# EAGLE board untitled (EAGLE 7.2.0)
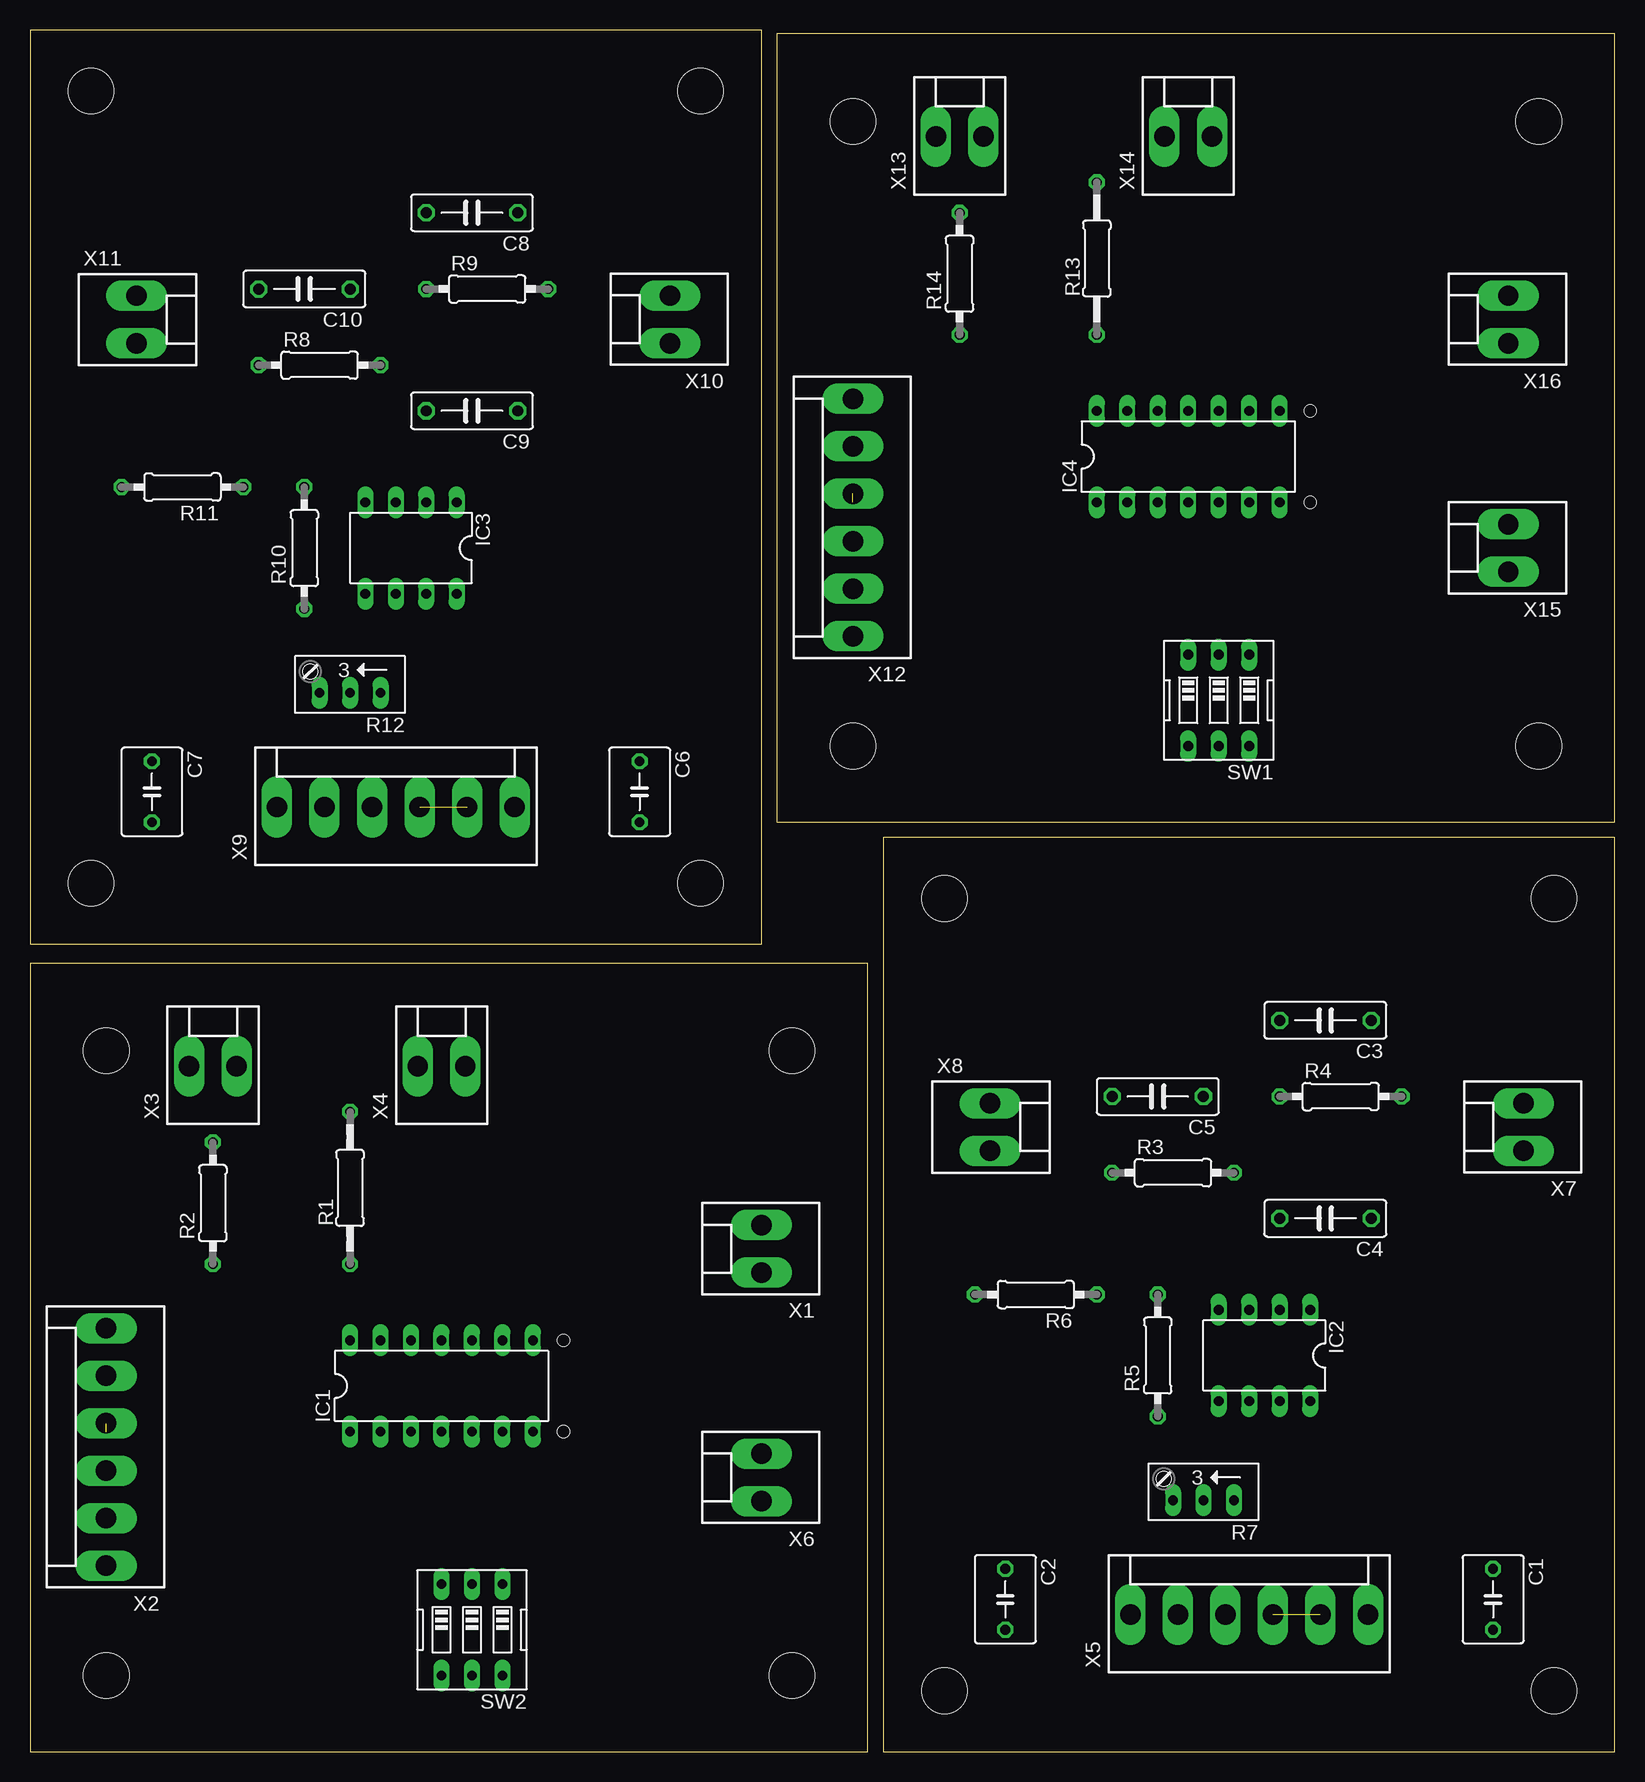
[diagram p0: board, top side]
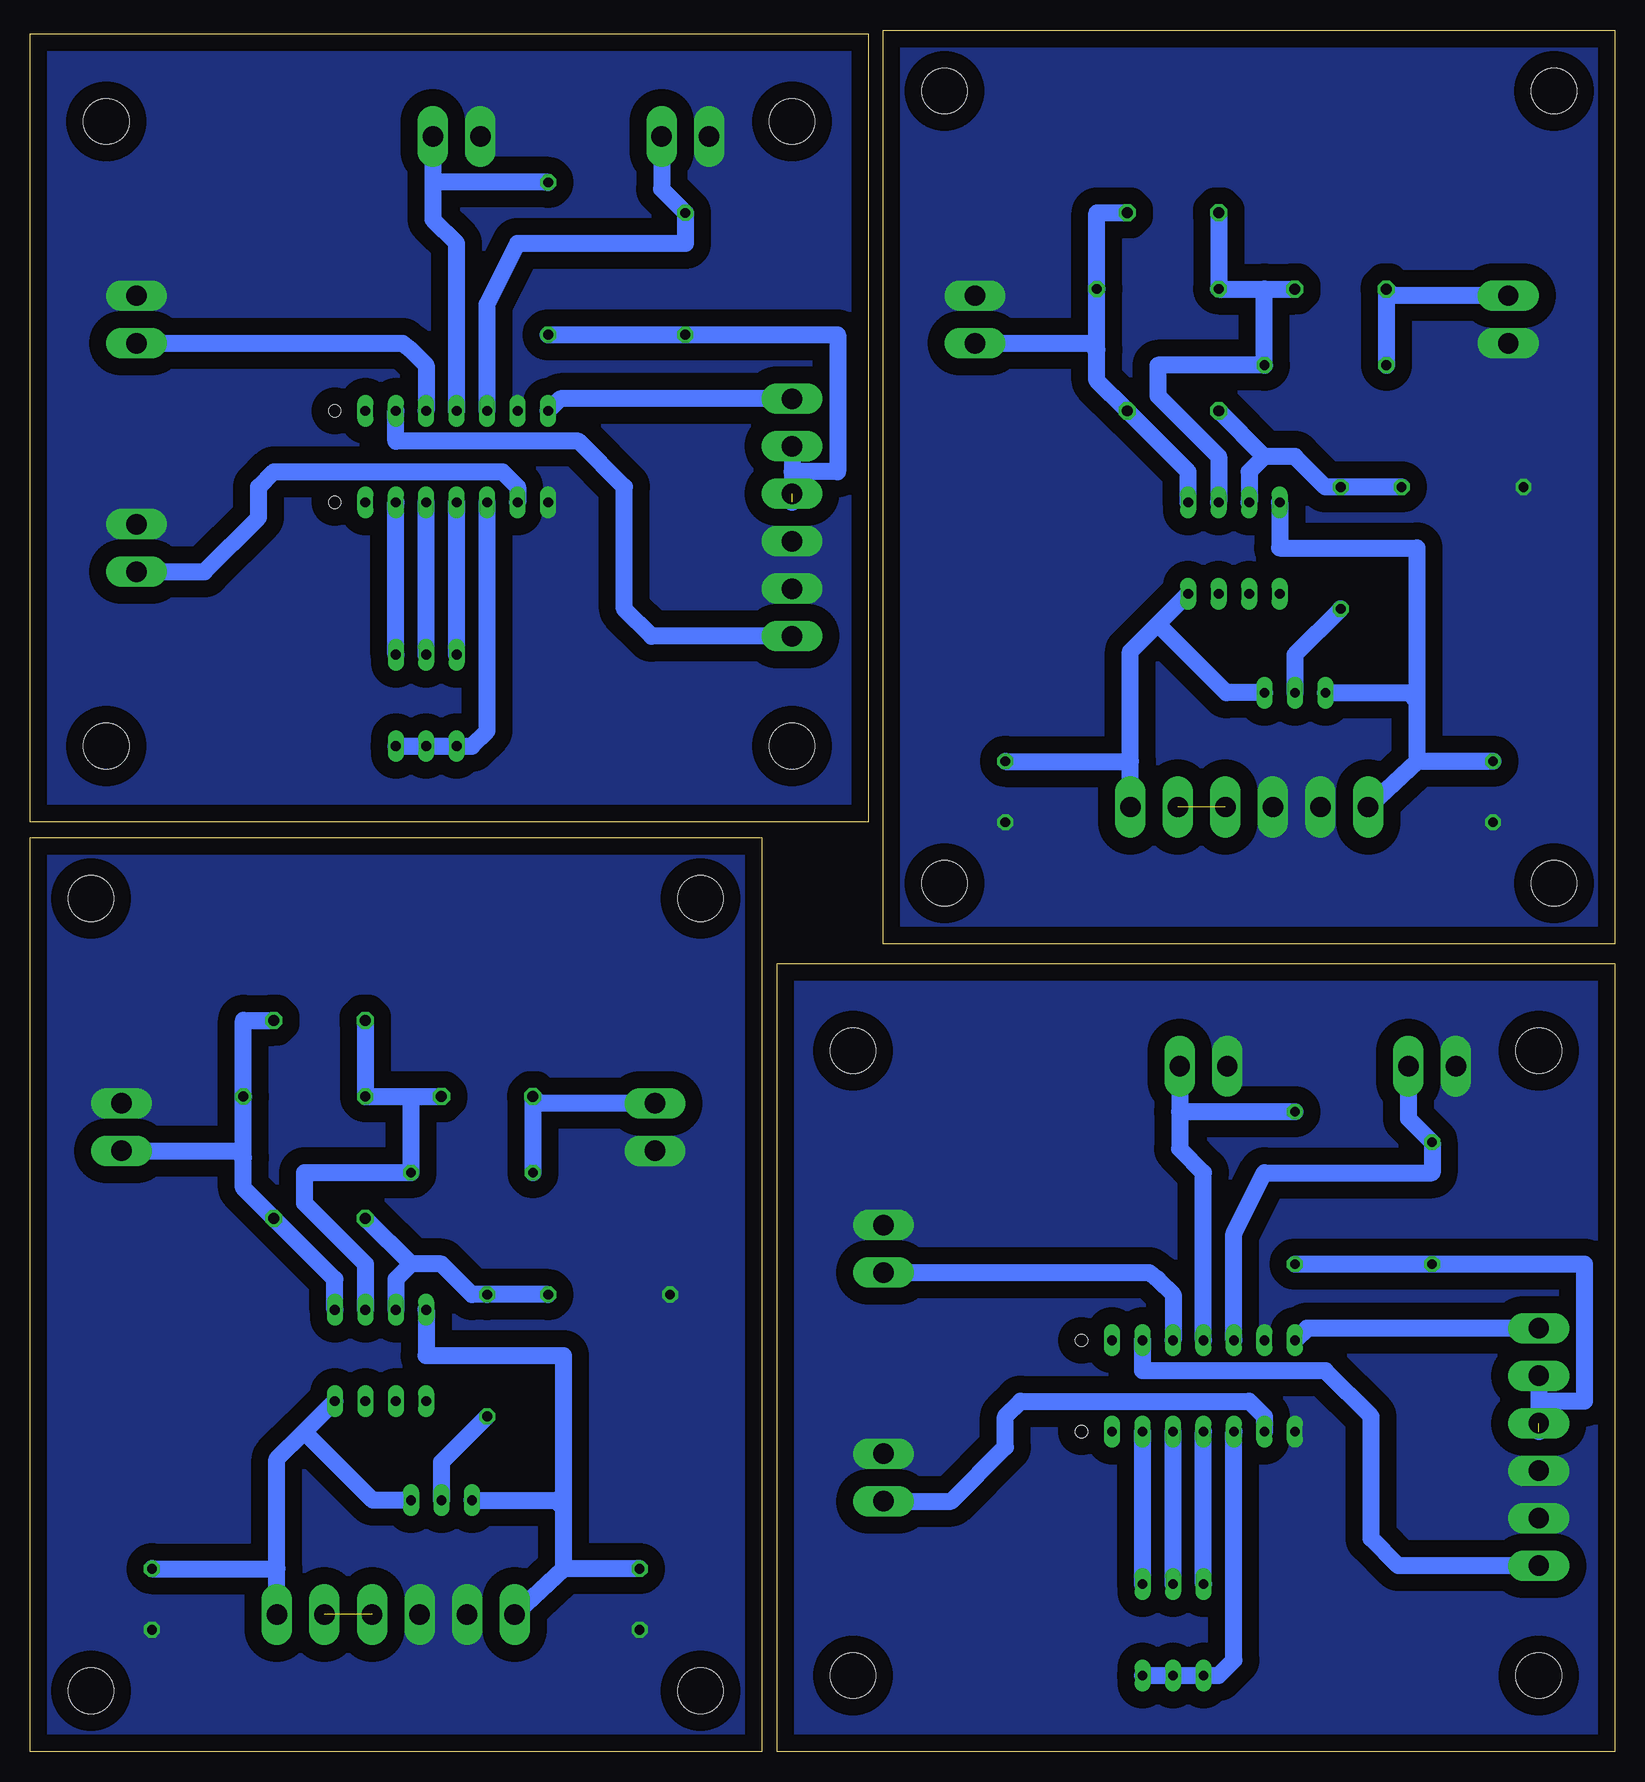
[diagram p1: board, bottom side, seen from below]

Size 132.08 x 143.51 mm. Coordinates in mm from the lower left corner, seen from the top.
Outline: 0,0 69.83,0 69.83,65.71 0,65.71 0,0
Outline: 71.12,0 132.08,0 132.08,76.2 71.12,76.2 71.12,0
Outline: 0,67.31 60.96,67.31 60.96,143.51 0,143.51 0,67.31
Outline: 62.23,77.47 132.06,77.47 132.06,143.18 62.23,143.18 62.23,77.47
Copper layers (1*16): Top 0.035mm / dielectric 1.5mm / Bottom 0.035mm
Design rules "default": minimum track width 10mil, minimum drill 24mil, track to track 8mil, track to pad 8mil, pad to pad 8mil, via to via 8mil, smd to smd 8mil, copper to edge 40mil, drill to drill 8mil, minimum pad ring 10mil, minimum via ring 8mil, stop-mask expansion 4mil, vias tented up to drill 0mil, thermal gap 10mil
Holes 3.8 mm at 63.5,6.35 6.35,6.35 6.35,58.42 63.5,58.42 76.2,71.12 127,71.12 127,5.08 76.2,5.08 5.08,138.43 55.88,138.43 55.88,72.39 5.08,72.39 125.73,83.82 68.58,83.82 68.58,135.89 125.73,135.89
Holes 1 mm at 44.45,34.29 44.45,26.67 106.68,111.76 106.68,104.14

## Footprints (pad centres in the part's own frame; a part is rotated, then mirrored left to right if it is on the bottom)
C050-050X075 = drill 0.813 octagon: 1 -2.54,0; 2 2.54,0
C075-032X103 = drill 0.914 octagon: 1 -3.81,0; 2 3.81,0
DIL14 = drill 0.813 long: 1 -7.62,-3.81; 2 -5.08,-3.81; 3 -2.54,-3.81; 4 0,-3.81; 5 2.54,-3.81; 6 5.08,-3.81; 7 7.62,-3.81; 8 7.62,3.81; 9 5.08,3.81; 10 2.54,3.81; 11 0,3.81; 12 -2.54,3.81; 13 -5.08,3.81; 14 -7.62,3.81
DIL08 = drill 0.813 long: 1 -3.81,-3.81; 2 -1.27,-3.81; 3 1.27,-3.81; 4 3.81,-3.81; 5 3.81,3.81; 6 1.27,3.81; 7 -1.27,3.81; 8 -3.81,3.81
0207/12 = drill 0.813 octagon: 1 -6.35,0; 2 6.35,0
0207/10 = drill 0.813 octagon: 1 -5.08,0; 2 5.08,0
RJ9W = drill 0.813 long: A 2.54,0.635; E -2.54,0.635; S 0,0.635
EDG-03 = drill 0.813 long: 1 -2.54,-3.81; 2 0,-3.81; 3 2.54,-3.81; 4 2.54,3.81; 5 0,3.81; 6 -2.54,3.81
KK-156-2 = drill 1.7 pad 2.184 long: 1 -1.98,0; 2 1.98,0
KK-156-6 = drill 1.7 pad 2.184 long: 1 -9.9,0; 2 -5.94,0; 3 -1.98,0; 4 1.98,0; 5 5.94,0; 6 9.9,0

## Placement (x,y rotation side)
C1  .1u  [C050-050X075]  121.92,12.7 270 top
C2  .1u  [C050-050X075]  81.28,12.7 270 top
C3  gimmick  [C075-032X103]  107.95,60.96 180 top
C4  150p  [C075-032X103]  107.95,44.45 180 top
C5  .68n  [C075-032X103]  93.98,54.61 180 top
C6  .1u  [C050-050X075]  50.8,80.01 270 top
C7  .1u  [C050-050X075]  10.16,80.01 270 top
C8  gimmick  [C075-032X103]  36.83,128.27 180 top
C9  150p  [C075-032X103]  36.83,111.76 180 top
C10  .68n  [C075-032X103]  22.86,121.92 180 top
IC1  IVC102UADAPTOR  [DIL14]  34.29,30.48 0 top
IC2  LF442N  [DIL08]  102.87,33.02 180 top
IC3  LF442N  [DIL08]  31.75,100.33 180 top
IC4  IVC102UADAPTOR  [DIL14]  96.52,107.95 0 top
R1  [0207/12]  26.67,46.99 90 top
R2  [0207/10]  15.24,45.72 90 top
R3  1M  [0207/10]  95.25,48.26 0 top
R4  10M  [0207/10]  109.22,54.61 0 top
R5  1M  [0207/10]  93.98,33.02 90 top
R6  649  [0207/10]  83.82,38.1 180 top
R7  50k  [RJ9W]  97.79,21.59 180 top
R8  1M  [0207/10]  24.13,115.57 0 top
R9  10M  [0207/10]  38.1,121.92 0 top
R10  1M  [0207/10]  22.86,100.33 90 top
R11  649  [0207/10]  12.7,105.41 180 top
R12  50k  [RJ9W]  26.67,88.9 180 top
R13  [0207/12]  88.9,124.46 90 top
R14  [0207/10]  77.47,123.19 90 top
SW1  [EDG-03]  99.06,87.63 180 top
SW2  [EDG-03]  36.83,10.16 180 top
X1  [KK-156-2]  60.96,41.91 90 top
X2  [KK-156-6]  6.35,25.4 90 top
X3  [KK-156-2]  15.24,57.15 0 top
X4  [KK-156-2]  34.29,57.15 0 top
X5  [KK-156-6]  101.6,11.43 0 top
X6  [KK-156-2]  60.96,22.86 90 top
X7  [KK-156-2]  124.46,52.07 90 top
X8  [KK-156-2]  80.01,52.07 270 top
X9  [KK-156-6]  30.48,78.74 0 top
X10  [KK-156-2]  53.34,119.38 90 top
X11  [KK-156-2]  8.89,119.38 270 top
X12  [KK-156-6]  68.58,102.87 90 top
X13  [KK-156-2]  77.47,134.62 0 top
X14  [KK-156-2]  96.52,134.62 0 top
X15  [KK-156-2]  123.19,100.33 90 top
X16  [KK-156-2]  123.19,119.38 90 top

## Library data of the parts
C1-C10 R1-R6 R8-R11 R13 R14 = resistor
IC1 IC4 = burr-brown
IC2 IC3 = linear
R7 R12 = pot
SW1 SW2 = special
X1-X16 = con-molex; OC_FARNELL: unknown; OC_NEWARK: unknown

## Nets
+5V: R1.1 R2.1 X2.4 X2.5
+5V1: X5.4 X5.5
+5V2: X9.4 X9.5
+5V3: R13.1 R14.1 X12.4 X12.5
+15V: IC1.14 X2.6
+15V1: C1.1 IC2.8 R7.E X5.6
+15V2: C6.1 IC3.8 R12.E X9.6
+15V3: IC4.14 X12.6
-15V: IC1.9 X2.1
-15V1: C2.1 IC2.4 R7.A X5.1
-15V2: C7.1 IC3.4 R12.A X9.1
-15V3: IC4.9 X12.1
GND: IC1.1 IC1.13 X1.2 X2.2 X2.3 X3.1 X4.1 X6.2
GND1: C1.2 C2.2 R6.2 X5.2 X5.3 X7.2 X8.2
GND2: C6.2 C7.2 R11.2 X9.2 X9.3 X10.2 X11.2
GND3: IC4.1 IC4.13 X12.2 X12.3 X13.1 X14.1 X15.2 X16.2
N$1: IC1.6 SW2.1
N$2: IC1.5 SW2.2
N$3: IC1.4 SW2.3
N$4: IC1.3 SW2.4 SW2.5 SW2.6
N$5: IC1.2 X6.1
N$6: IC1.10 X1.1
N$7: C3.2 C5.1 IC2.2 R3.2 R4.1
N$8: C3.1 C4.1 IC2.1 R4.2 X7.1
N$9: C5.2 R3.1 X8.1
N$10: C4.2 IC2.3 R5.2 R6.1
N$11: R5.1 R7.S
N$12: C8.2 C10.1 IC3.2 R8.2 R9.1
N$13: C8.1 C9.1 IC3.1 R9.2 X10.1
N$14: C10.2 R8.1 X11.1
N$15: C9.2 IC3.3 R10.2 R11.1
N$16: R10.1 R12.S
N$17: IC4.6 SW1.1
N$18: IC4.5 SW1.2
N$19: IC4.4 SW1.3
N$20: IC4.3 SW1.4 SW1.5 SW1.6
N$21: IC4.2 X15.1
N$22: IC4.10 X16.1
RESET: IC1.12 R2.2 X3.2
RESET1: IC4.12 R14.2 X13.2
SAMPLE: IC1.11 R1.2 X4.2
SAMPLE1: IC4.11 R13.2 X14.2

## Tracks (layer width: path | path; a pad name or v marks a point on that pad's centre or on a via)
+5V  (1 unrouted)
  Bottom 1.422: X2.5 6.35,29.21 | 6.35,29.21 6.35,26.67 | R1.1 R2.1 2.54,40.64 2.54,29.21 6.35,29.21
+5V1  (1 unrouted)
+5V2  (1 unrouted)
+5V3  (1 unrouted)
  Bottom 1.422: X12.5 68.58,106.68 | 68.58,106.68 68.58,104.14 | R13.1 R14.1 64.77,118.11 64.77,106.68 68.58,106.68
+15V
  Bottom 1.422: X2.6 25.66,35.3 IC1.14
+15V1
  Bottom 1.422: X5.6 111.5,15.24 | 111.5,15.24 111.5,24.39 109.22,26.67 | 109.22,26.67 IC2.8 | C1.1 111.5,15.24 | R7.E 103.5,20.95 109.22,26.67
+15V2
  Bottom 1.422: X9.6 40.38,82.55 | 40.38,82.55 40.38,91.7 38.1,93.98 | 38.1,93.98 IC3.8 | C6.1 40.38,82.55 | R12.E 32.38,88.27 38.1,93.98
+15V3
  Bottom 1.422: X12.6 87.89,112.77 IC4.14
-15V
  Bottom 1.422: X2.1 18.04,15.5 20.32,17.78 20.32,27.94 24.13,31.75 39.37,31.75 IC1.9
-15V1
  Bottom 1.422: IC2.4 99.06,33.02 87.63,33.02 87.63,20.32 | 87.63,20.32 87.63,15.24 | 87.63,15.24 91.44,11.69 X5.1 | C2.1 87.63,15.24 | R7.A 88.27,20.95 87.63,20.32
-15V2
  Bottom 1.422: IC3.4 27.94,100.33 16.51,100.33 16.51,87.63 | 16.51,87.63 16.51,82.55 | 16.51,82.55 20.32,79 X9.1 | C7.1 16.51,82.55 | R12.A 17.14,88.27 16.51,87.63
-15V3
  Bottom 1.422: X12.1 80.27,92.97 82.55,95.25 82.55,105.41 86.36,109.22 101.6,109.22 IC4.9
GND
  pour Bottom (isolate 1.422, no thermals): 0,66.04 69.85,66.04 69.85,0 0,0
GND1
  pour Bottom (isolate 1.422, no thermals): 71.12,76.2 132.08,76.2 132.08,0 71.12,0
GND2
  pour Bottom (isolate 1.422, no thermals): 0,143.51 60.96,143.51 60.96,67.31 0,67.31
GND3
  pour Bottom (isolate 1.422, no thermals): 62.23,143.51 132.08,143.51 132.08,77.47 62.23,77.47
N$1
  Bottom 1.422: SW2.1 IC1.6
N$2
  Bottom 1.422: SW2.2 IC1.5
N$3
  Bottom 1.422: SW2.3 IC1.4
N$4
  Bottom 1.422: SW2.6 SW2.5 SW2.4 33.02,6.35 31.75,7.62 IC1.3
N$5
  Bottom 1.422: IC1.2 29.21,27.94 30.48,29.21 49.53,29.21 50.8,27.94 50.8,25.4 55.32,20.88 X6.1
N$6
  Bottom 1.422: X1.1 38.81,39.93 38.1,39.37 36.83,38.1 IC1.10
N$7
  Bottom 1.422: C3.2 R4.1 100.33,54.61 | IC2.2 104.14,40.64 109.22,45.72 109.22,48.26 R3.2 100.33,54.61 | 100.33,54.61 C5.1
N$8
  Bottom 1.422: IC2.1 106.68,39.37 C4.1 114.3,46.99 114.3,49.53 | C3.1 114.3,60.96 R4.2 114.3,49.53 | X7.1 114.86,50.09 114.3,49.53
N$9
  Bottom 1.422: R3.1 C5.2 89.61,54.05 X8.1
N$10
  Bottom 1.422: R6.1 R5.2 95.25,38.1 97.79,40.64 100.33,40.64 | 100.33,40.64 101.6,39.37 IC2.3 | C4.2 100.33,40.64
N$11
  Bottom 1.422: R5.1 97.79,24.13 R7.S
N$12
  Bottom 1.422: C8.2 R9.1 29.21,121.92 | IC3.2 33.02,107.95 38.1,113.03 38.1,115.57 R8.2 29.21,121.92 | 29.21,121.92 C10.1
N$13
  Bottom 1.422: IC3.1 35.56,106.68 C9.1 43.18,114.3 43.18,116.84 | C8.1 43.18,128.27 R9.2 43.18,116.84 | X10.1 43.74,117.4 43.18,116.84
N$14
  Bottom 1.422: R8.1 C10.2 18.49,121.36 X11.1
N$15
  Bottom 1.422: R11.1 R10.2 24.13,105.41 26.67,107.95 29.21,107.95 | 29.21,107.95 30.48,106.68 IC3.3 | C9.2 29.21,107.95
N$16
  Bottom 1.422: R10.1 26.67,91.44 R12.S
N$17
  Bottom 1.422: SW1.1 IC4.6
N$18
  Bottom 1.422: SW1.2 IC4.5
N$19
  Bottom 1.422: SW1.3 IC4.4
N$20
  Bottom 1.422: SW1.6 SW1.5 SW1.4 95.25,83.82 93.98,85.09 IC4.3
N$21
  Bottom 1.422: IC4.2 91.44,105.41 92.71,106.68 111.76,106.68 113.03,105.41 113.03,102.87 117.55,98.35 X15.1
N$22
  Bottom 1.422: X16.1 101.04,117.4 100.33,116.84 99.06,115.57 IC4.10
RESET
  Bottom 1.422: IC1.12 31.75,43.18 29.21,48.26 15.24,48.26 R2.2 17.22,52.78 X3.2
RESET1
  Bottom 1.422: IC4.12 93.98,120.65 91.44,125.73 77.47,125.73 R14.2 79.45,130.25 X13.2
SAMPLE
  Bottom 1.422: IC1.11 34.29,48.26 36.27,50.24 36.27,53.34 | X4.2 36.27,53.34 | R1.2 36.27,53.34
SAMPLE1
  Bottom 1.422: IC4.11 96.52,125.73 98.5,127.71 98.5,130.81 | X14.2 98.5,130.81 | R13.2 98.5,130.81